# Altium PCB PCB_all_try_6.PcbDoc (part 4 of 5)
Units mm, origin at the board's own origin, x right, y up, seen from the top; angles counter-clockwise.
Board outline 425 x 295 mm, 2 copper layers (Top Layer, Bottom Layer); 485 components, 419 nets, 1569 pads, 847 vias.
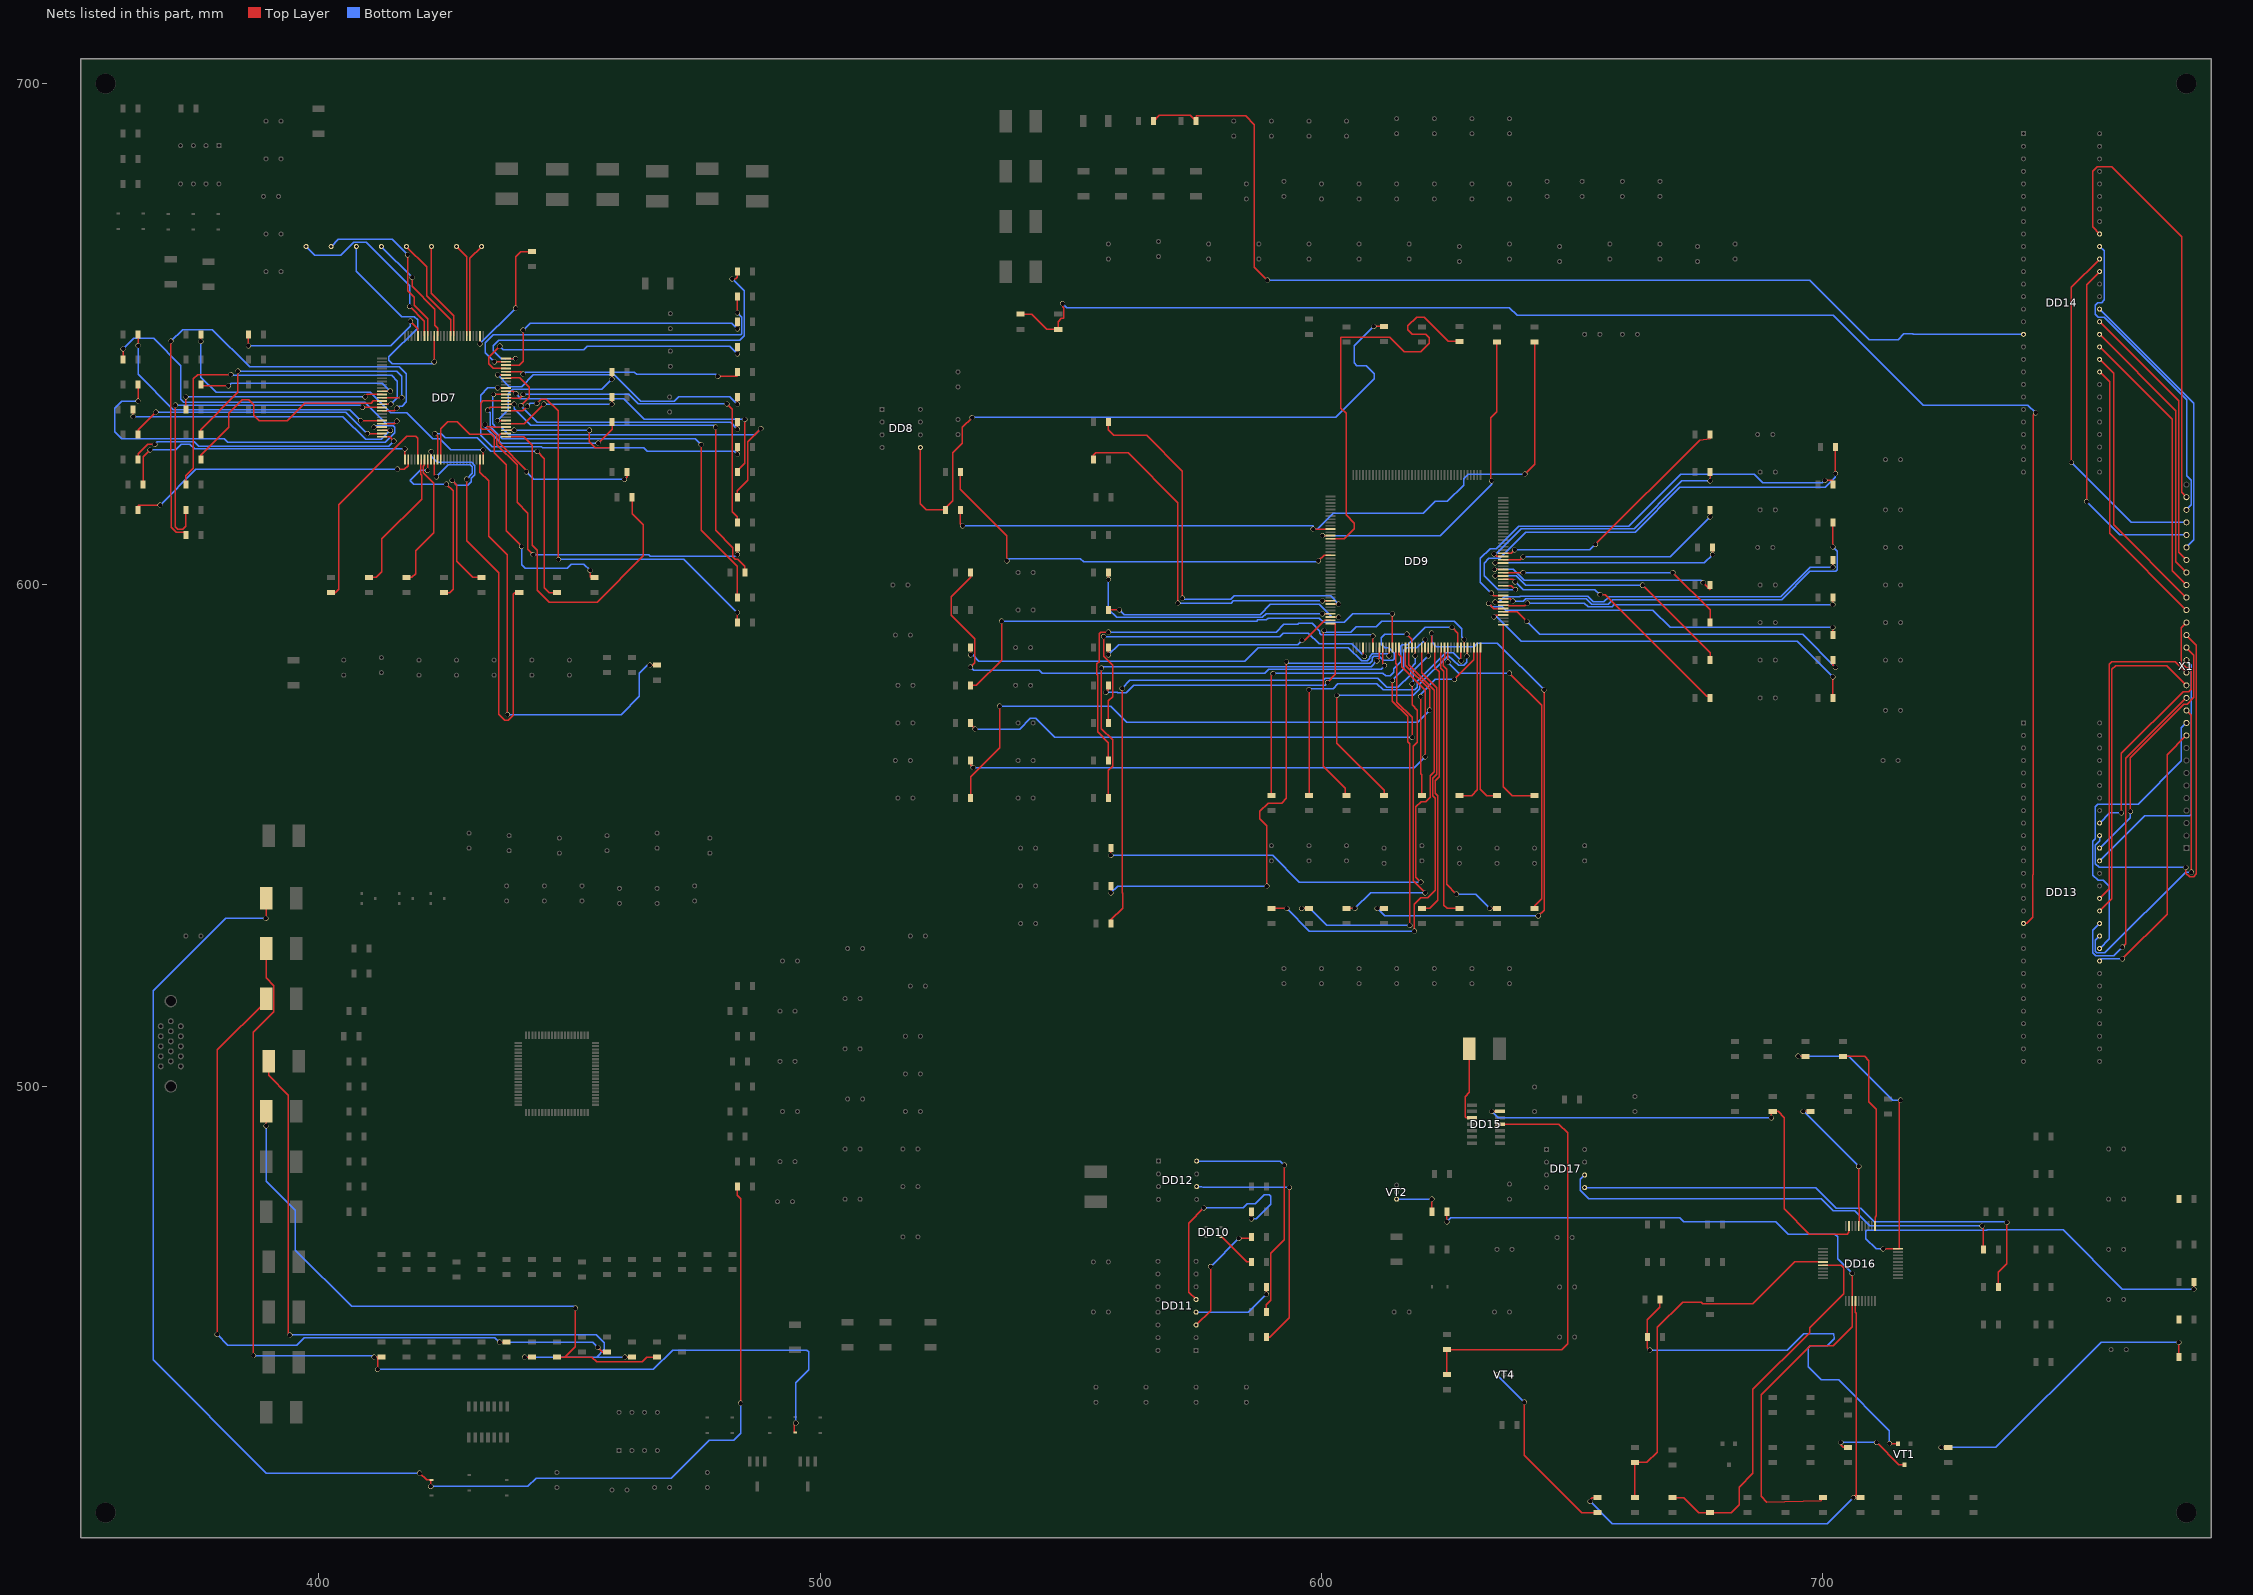
[diagram p4: the nets of this part, all layers, seen from the top]

## Via types
v1: diameter 1, hole 0.9, Top Layer to Bottom Layer, 847 vias

## Nets (pads, with @x,y where several pads share a name; then routed paths per layer and width w, separated by ;. In a path a pad name is that pad's centre, name@x,y a point inside that pad or via, vN(x,y) a via of type N, cw(c..) or ccw(c..) an arc to the next point about the centre after c; other vN are vias at no path point) (continued)
NetDD7_11: DD7.11 R72.1 | length 40.6
  Top Layer w0.25: R72.1@376.5,640 376.5,639.699 v1(381.991,639.699) ; DD7.11@412.65,638.65 414.274,638.65 v1(414.274,638.658)
  Bottom Layer w0.25: v1(381.991,639.699) 382.575,640.283 412.648,640.283 v1(414.274,638.658)
NetDD7_12: DD7.12 R71.1 | length 41.9
  Top Layer w0.25: R71.1@373.5,635 v1(373.5,637.515) ; v1(409.242,637.515) 409.727,638 DD7.12@412.65,638
  Bottom Layer w0.25: v1(373.5,637.515) v1(409.242,637.515)
NetDD7_13: DD7.13 R70.1 | length 57.1
  Top Layer w0.25: R70.1@376.5,630 376.5,631.008 383.896,638.404 v1(383.896,642.671) ; DD7.13@412.65,637.35 v1(416.585,637.35)
  Bottom Layer w0.25: v1(383.896,642.671) 415.544,642.671 416.585,641.629 v1(416.585,637.35)
NetDD7_14: DD7.14 R69.1 | length 47.8
  Top Layer w0.25: R69.1@376.5,625 376.5,625.856 382.067,631.423 382.067,634.213 384.785,636.93 386.08,636.93 387.096,635.914 387.096,633.806 388.112,632.79 393.725,632.79 397.231,636.295 410.489,636.295 410.894,636.7 DD7.14@412.65,636.7
NetDD7_15: DD7.15 R68.1 | length 70.1
  Top Layer w0.25: R68.1@373.5,620 373.5,621.785 375.006,623.291 375.006,641.096 375.844,641.934 v1(382.473,641.934) ; DD7.15@412.65,636.05 v1(414.376,636.05)
  Bottom Layer w0.25: v1(382.473,641.934) 382.626,641.782 414.528,641.782 415.671,640.639 415.671,637.345 v1(414.376,636.05)
NetDD7_16: DD7.16 R67.1 | length 71.5
  Top Layer w0.25: v1(371.399,635.864) 371.399,611.591 371.856,611.134 372.872,611.134 373.5,611.762 R67.1@373.5,615 ; v1(408.711,635.406) 408.718,635.4 DD7.16@412.65,635.4
  Bottom Layer w0.25: v1(371.399,635.864) 408.254,635.864 v1(408.711,635.406)
NetDD7_17: DD7.17 R66.1 | length 103.7
  Top Layer w0.25: v1(370.51,648.614) 370.51,617.857 370.625,617.742 370.625,611.517 371.602,610.54 373.5,610.54 R66.1@373.5,610 ; DD7.17@412.65,634.75 415.091,634.75 v1(415.595,635.254)
  Bottom Layer w0.25: v1(370.51,648.614) 372.847,650.951 378.816,650.951 386.283,643.484 416.103,643.484 417.474,642.112 417.474,636.524 416.636,635.686 416.027,635.686 v1(415.595,635.254)
NetDD7_20: DD7.20 R89.1 | length 60.5
  Top Layer w0.25: v1(364,647.751) R89.1@364,650 ; v1(408.371,632.8) DD7.20@412.65,632.8
  Bottom Layer w0.25: v1(364,647.751) 364,642.018 371.033,634.985 406.187,634.985 v1(408.371,632.8)
NetDD7_21: DD7.21 R88.1 | length 71.8
  Top Layer w0.25: R88.1@361,645 v1(361,647.08) ; DD7.21@412.65,632.15 415.082,632.15 v1(415.595,632.663)
  Bottom Layer w0.25: v1(361,647.08) 363.093,649.173 367.106,649.173 372.516,643.763 372.516,637.032 373.101,636.448 409.169,636.448 413.383,632.233 415.165,632.233 v1(415.595,632.663)
NetDD7_22: DD7.22 R87.1 | length 77.9
  Top Layer w0.25: v1(364,636.651) R87.1@364,640 ; v1(411.028,631.495) 411.033,631.5 DD7.22@412.65,631.5
  Bottom Layer w0.25: v1(364,636.651) 360.731,636.651 359.334,635.254 359.334,630.555 360.68,629.209 381.127,629.209 381.914,628.421 413.258,628.421 415.163,630.326 415.163,631.444 414.878,631.729 411.262,631.729 v1(411.028,631.495)
NetDD7_23: DD7.23 R86.1 | length 57
  Top Layer w0.25: v1(362.991,633.578) 363,633.586 R86.1@363,635 ; DD7.23@412.65,630.85 v1(414.274,630.85)
  Bottom Layer w0.25: v1(362.991,633.578) 404.825,633.578 409.372,629.031 412.455,629.031 v1(414.274,630.85)
NetDD7_24: DD7.24 R85.1 | length 52.8
  Top Layer w0.25: R85.1@364,630 364,630.936 v1(367.545,634.481) ; v1(409.727,630.2) DD7.24@412.65,630.2
  Bottom Layer w0.25: v1(367.545,634.481) 405.447,634.481 v1(409.727,630.2)
NetDD7_25: DD7.25 R84.1 | length 56.6
  Top Layer w0.25: R84.1@364,625 364,626.135 365.93,628.066 v1(367.327,628.066) ; DD7.25@412.65,629.55 414.161,629.55 v1(415.011,628.701)
  Bottom Layer w0.25: v1(367.327,628.066) 367.835,628.573 375.21,628.573 376.089,627.694 414.004,627.694 v1(415.011,628.701)
NetDD7_26: DD7.26 R83.1 | length 61.3
  Top Layer w0.25: R83.1@365,620 365,625.579 v1(366.37,626.948) ; DD7.26@417.2,625 v1(417.2,627.126)
  Bottom Layer w0.25: v1(366.37,626.948) 371.497,626.948 372.618,628.069 374.317,628.069 375.26,627.126 v1(417.2,627.126)
NetDD7_27: DD7.27 R82.1 | length 59.2
  Top Layer w0.25: R82.1@364,615 364,615.95 v1(368.376,615.95) ; v1(415.696,623.087) 417.113,623.087 417.85,623.824 DD7.27@417.85,625
  Bottom Layer w0.25: v1(368.376,615.95) 375.514,623.087 v1(415.696,623.087)
NetDD7_30: DD7.30 R107.1 | length 44.6
  Top Layer w0.25: R107.1@402.5,598.5 403.352,598.5 403.962,599.11 403.962,616.052 417.576,629.666 419.379,629.666 419.8,629.245 DD7.30@419.8,625
NetDD7_31: DD7.31 R106.1 | length 28.8
  Top Layer w0.25: R106.1@410,601.5 411.48,601.5 412.598,602.618 412.598,609.19 420.537,617.129 420.537,621.884 420.367,622.054 420.367,624.179 420.45,624.262 DD7.31@420.45,625
NetDD7_32: DD7.32 R105.1 | length 27.4
  Top Layer w0.25: R105.1@417.5,601.5 418.592,601.5 419.329,602.237 419.329,606.781 422.961,610.413 422.961,620.268 420.871,622.358 420.871,623.672 421.1,623.901 DD7.32@421.1,625
NetDD7_33: DD7.33 R104.1 | length 37.6
  Top Layer w0.25: v1(421.75,622.859) DD7.33@421.75,625 ; R104.1@425,598.5 426.136,598.5 426.822,599.186 426.822,618.754 v1(425.45,620.126)
  Bottom Layer w0.25: v1(421.75,622.859) 420.268,622.859 418.262,620.852 418.262,620.776 418.912,620.126 v1(425.45,620.126)
NetDD7_34: DD7.34 R103.1 | length 42.9
  Top Layer w0.25: DD7.34@422.4,625 422.4,626.581 v1(422.427,626.608) ; v1(426.593,620.852) 427.533,619.912 427.533,604.7 430.733,601.5 R103.1@432.5,601.5
  Bottom Layer w0.25: v1(422.427,626.608) 422.427,625.69 423.672,624.445 430.505,624.445 431.126,623.824 431.126,622.027 430.408,621.309 430.408,620.563 429.768,619.922 427.523,619.922 v1(426.593,620.852)
NetDD7_35: DD7.35 R102.1 | length 93.7
  Top Layer w0.25: DD7.35@423.05,625 423.05,621.967 v1(423.453,621.563) ; v1(429.489,621.132) 429.489,608.866 435.889,602.465 435.889,574.269 437.134,573.024 437.794,573.024 438.81,574.04 438.81,598.17 439.14,598.5 R102.1@440,598.5
  Bottom Layer w0.25: v1(423.453,621.563) 425.831,623.941 430.276,623.941 430.622,623.595 430.622,622.265 v1(429.489,621.132)
NetDD7_36: DD7.36 R101.1 | length 57.9
  Top Layer w0.25: v1(423.189,630.174) 423.7,629.663 DD7.36@423.7,625 ; v1(443.586,626.669) 445.033,625.221 445.033,599.44 445.973,598.5 R101.1@447.5,598.5
  Bottom Layer w0.25: v1(423.189,630.174) 424.42,630.174 425.258,629.336 431.648,629.336 434.315,626.669 v1(443.586,626.669)
NetDD7_37: DD7.37 R100.1 | length 63.4
  Top Layer w0.25: DD7.37@424.35,625 424.35,631.157 425.704,632.511 427.66,632.511 430.149,630.022 434.442,630.022 435,629.463 435,626.415 437.439,623.976 437.439,610.768 v1(440.487,607.72) ; v1(454.152,602.894) 454.152,601.5 R100.1@455,601.5
  Bottom Layer w0.25: v1(440.487,607.72) 440.487,604.063 441.208,603.342 449.565,603.342 450.368,604.144 452.902,604.144 v1(454.152,602.894)
NetDD7_49: DD7.49 R97.1 | length 89.7
  Top Layer w0.25: DD7.49@432.15,625 432.15,622.526 433.895,620.781 433.895,609.75 437.657,605.988 437.657,574.182 v1(437.642,574.167) ; v1(466.065,584) R97.1@467.5,584
  Bottom Layer w0.25: v1(437.642,574.167) 460.299,574.167 463.956,577.825 463.956,582.397 465.56,584 v1(466.065,584)
NetDD7_50: DD7.50 R96.1 | length 72.8
  Top Layer w0.25: v1(376.5,648.564) R96.1@376.5,650 ; DD7.50@432.8,625 v1(432.8,626.923)
  Bottom Layer w0.25: v1(376.5,648.564) 376.5,641.456 379.552,638.404 410.261,638.404 414.325,634.34 417.576,634.34 422.77,629.145 424.167,629.145 426.39,626.923 v1(432.8,626.923)
NetDD7_51: DD7.51 R95.1 | length 73.8
  Top Layer w0.25: DD7.51@437.35,629.55 440.932,629.55 442.61,627.872 442.61,607.964 443.626,606.948 443.626,598.917 445.938,596.605 455.533,596.605 464.718,605.79 464.718,612.004 462.5,614.223 R95.1@462.5,617.5
NetDD7_52: DD7.52 R94.1 | length 32.8
  Top Layer w0.25: DD7.52@437.35,630.2 436.296,630.2 436.016,629.92 436.016,628.328 441.427,622.918 v1(441.427,622.579) ; v1(460.985,621.081) 461.5,621.596 R94.1@461.5,622.5
  Bottom Layer w0.25: v1(441.427,622.579) 442.925,621.081 v1(460.985,621.081)
NetDD7_53: DD7.53 R93.1 | length 24.1
  Top Layer w0.25: DD7.53@437.35,630.85 438.978,630.85 v1(438.988,630.86) ; v1(454,630.86) 454,628.548 455.168,627.38 458.5,627.38 R93.1@458.5,627.5
  Bottom Layer w0.25: v1(438.988,630.86) v1(454,630.86)
NetDD7_54: DD7.54 R92.1 | length 34.1
  Top Layer w0.25: v1(433.172,632.008) 433.583,631.597 434.734,631.597 434.832,631.5 DD7.54@437.35,631.5 ; v1(455.727,628.294) 458.5,631.068 R92.1@458.5,632.5
  Bottom Layer w0.25: v1(433.172,632.008) 433.172,631.5 436.377,628.294 v1(455.727,628.294)
NetDD7_55: DD7.55 R91.1 | length 24.2
  Top Layer w0.25: DD7.55@437.35,632.15 440.997,632.15 v1(444.913,636.067) ; v1(458.495,636.067) 458.5,636.071 R91.1@458.5,637.5
  Bottom Layer w0.25: v1(444.913,636.067) v1(458.495,636.067)
NetDD7_56: DD7.56 R90.1 | length 31.3
  Top Layer w0.25: v1(435.635,632.79) 435.645,632.8 DD7.56@437.35,632.8 ; v1(458.495,641.071) 458.5,641.075 R90.1@458.5,642.5
  Bottom Layer w0.25: v1(435.635,632.79) 437.769,634.924 437.769,638.124 438.697,639.052 456.477,639.052 v1(458.495,641.071)
NetDD7_59: DD7.59 R81.1 | length 84.1
  Top Layer w0.25: DD7.59@437.35,634.75 440.719,634.75 v1(441.63,635.66) ; v1(443.535,636.219) 444.348,637.032 445.414,637.032 447.735,634.712 447.735,605.146 v1(447.802,605.079) ; v1(483.489,594.512) 483.5,594.501 R81.1@483.5,592.5
  Bottom Layer w0.25: v1(441.63,635.66) 442.189,636.219 v1(443.535,636.219) ; v1(447.802,605.079) 447.875,605.152 472.849,605.152 v1(483.489,594.512)
NetDD7_60: DD7.60 R80.1 | length 84.5
  Top Layer w0.25: v1(433.68,634.892) 434.188,635.4 DD7.60@437.35,635.4 ; v1(476.275,628.015) 476.275,610.919 483.5,603.694 R80.1@483.5,597.5
  Bottom Layer w0.25: v1(433.68,634.892) 434.202,634.37 434.202,631.596 436.589,629.209 475.082,629.209 v1(476.275,628.015)
NetDD7_61: DD7.61 R79.1 | length 75.9
  Top Layer w0.25: DD7.61@437.35,636.05 v1(438.988,636.05) ; v1(479.146,631.495) 479.146,610.895 482.6,607.441 482.6,605.663 483.108,605.155 483.616,605.155 485,603.771 R79.1@485,602.5
  Bottom Layer w0.25: v1(438.988,636.05) 438.988,635.177 442.341,631.825 478.815,631.825 v1(479.146,631.495)
NetDD7_62: DD7.62 R78.1 | length 83.2
  Top Layer w0.25: DD7.62@437.35,636.7 432.748,636.7 432.293,636.245 432.293,631.409 432.664,631.038 434.34,631.038 435.512,629.865 435.512,628.015 439.572,623.955 439.572,616.509 441.731,614.35 441.731,607.085 v1(442.747,606.069) ; v1(483.489,606.069) 483.5,606.08 R78.1@483.5,607.5
  Bottom Layer w0.25: v1(442.747,606.069) 465.781,606.069 466.135,605.715 483.134,605.715 v1(483.489,606.069)
NetDD7_63: DD7.63 R77.1 | length 69.7
  Top Layer w0.25: DD7.63@437.35,637.35 438.465,637.35 438.544,637.271 440.059,637.271 v1(440.792,638.003) ; v1(481.432,636.117) 482.524,635.025 482.524,614.589 483.5,613.613 R77.1@483.5,612.5
  Bottom Layer w0.25: v1(440.792,638.003) 461.856,638.003 463.742,636.117 v1(481.432,636.117)
NetDD7_64: DD7.64 R76.1 | length 78.9
  Top Layer w0.25: v1(434.833,638) DD7.64@437.35,638 ; R76.1@483.5,617.5 483.5,618.795 485.546,620.841 485.546,628.523 v1(488.188,631.165)
  Bottom Layer w0.25: v1(434.833,638) 434.706,637.873 434.706,632.12 435.356,631.469 436.397,631.469 437.921,629.945 486.969,629.945 v1(488.188,631.165)
NetDD7_65: DD7.65 R75.1 | length 61.2
  Top Layer w0.25: DD7.65@437.35,638.65 438.843,638.65 v1(439.344,638.15) ; R75.1@483.5,622.5 483.5,622.808 485.013,624.321 v1(485.013,633.019)
  Bottom Layer w0.25: v1(439.344,638.15) 439.42,638.15 439.744,637.825 440.186,637.098 460.842,637.098 464.922,633.019 v1(485.013,633.019)
NetDD7_66: DD7.66 R74.1 | length 67.8
  Top Layer w0.25: v1(435.704,639.293) 435.712,639.3 DD7.66@437.35,639.3 ; v1(483.489,626.085) 483.5,626.096 R74.1@483.5,627.5
  Bottom Layer w0.25: v1(435.704,639.293) 433.756,639.293 432.293,637.829 432.293,629.885 434.629,627.548 444.457,627.548 444.625,627.38 464.82,627.38 465.557,626.643 482.93,626.643 v1(483.489,626.085)
NetDD7_69: DD7.69 R65.1 | length 56.5
  Top Layer w0.25: DD7.69@437.35,641.25 438.382,641.25 438.469,641.337 440.119,641.337 441.992,639.464 441.992,637.471 v1(440.309,635.787) ; v1(483.489,631.063) 483.5,631.074 R65.1@483.5,632.5
  Bottom Layer w0.25: v1(440.309,635.787) 440.309,635.706 443.606,632.409 482.143,632.409 v1(483.489,631.063)
NetDD7_70: DD7.70 R64.1 | length 56
  Top Layer w0.25: v1(435.712,641.909) 435.72,641.9 DD7.70@437.35,641.9 ; v1(483.5,636.067) R64.1@483.5,637.5
  Bottom Layer w0.25: v1(435.712,641.909) 438.048,639.572 440.461,639.572 442.839,641.95 458.937,641.95 464.266,636.621 470.865,636.621 471.784,637.54 482.027,637.54 v1(483.5,636.067)
NetDD7_71: DD7.71 R63.1 | length 47.8
  Top Layer w0.25: DD7.71@437.35,642.55 440.277,642.55 v1(440.792,642.036) ; v1(479.628,641.604) 483.5,641.604 R63.1@483.5,642.5
  Bottom Layer w0.25: v1(440.792,642.036) 441.209,642.454 462.985,642.454 463.403,642.036 479.196,642.036 v1(479.628,641.604)
NetDD7_72: DD7.72 R61.1 | length 58.2
  Top Layer w0.25: v1(436.118,647.624) 433.934,645.439 433.934,644.114 434.848,643.2 DD7.72@437.35,643.2 ; v1(483.489,646.074) 483.5,646.085 R61.1@483.5,647.5
  Bottom Layer w0.25: v1(436.118,647.624) 436.782,646.959 452.885,646.959 453.549,647.624 481.94,647.624 v1(483.489,646.074)
NetDD7_73: DD7.73 R60.1 | length 55.1
  Top Layer w0.25: DD7.73@437.35,643.85 439.99,643.85 440.792,644.652 v1(440.792,650.824) ; v1(483.489,651.089) 483.5,651.1 R60.1@483.5,652.5
  Bottom Layer w0.25: v1(440.792,650.824) 442.163,652.196 482.382,652.196 v1(483.489,651.089)
NetDD7_74: DD7.74 R58.1 | length 66.5
  Top Layer w0.25: v1(435.051,644.5) DD7.74@437.35,644.5 ; v1(483.5,654.268) R58.1@483.5,657.5
  Bottom Layer w0.25: v1(435.051,644.5) 433.222,646.329 433.222,648.284 434.848,649.91 484.2,649.91 484.378,650.088 484.378,653.39 v1(483.5,654.268)
NetDD7_75: DD7.75 R55.1 | length 73.5
  Top Layer w0.25: DD7.75@437.35,645.15 v1(439.268,645.15) ; v1(482.473,661.06) 483.144,661.06 483.5,661.416 R55.1@483.5,662.5
  Bottom Layer w0.25: v1(439.268,645.15) 436.458,645.15 434.848,646.76 434.848,647.751 435.864,648.767 483.946,648.767 484.886,649.707 484.886,658.647 v1(482.473,661.06)
NetDD7_77: DD7.77 R54.1 | length 25.6
  Top Layer w0.25: v1(432.13,648.081) 432.15,648.101 DD7.77@432.15,649.7 ; v1(439.268,655.218) 439.268,665.48 440.288,666.5 R54.1@442.5,666.5
  Bottom Layer w0.25: v1(432.13,648.081) v1(439.268,655.218)
NetDD7_80: DD7.80 RX_D2+.1 | length 18.9
  Top Layer w0.25: DD7.80@430.2,649.7 430.2,650.179 430.117,650.179 430.117,665.117 RX_D2+.1@432.5,667.5
NetDD7_81: DD7.81 RX_D2-.1 | length 18.6
  Top Layer w0.25: RX_D2-.1@427.5,667.5 429.55,665.45 DD7.81@429.55,649.7
NetDD7_85: DD7.85 RX_D1+.1 | length 19.6
  Top Layer w0.25: RX_D1+.1@422.5,667.5 422.5,658.143 426.95,653.693 DD7.85@426.95,649.7
NetDD7_86: DD7.86 RX_D1-.1 | length 21.4
  Top Layer w0.25: RX_D1-.1@417.5,667.5 421.538,663.462 421.538,657.682 426.3,652.921 DD7.86@426.3,649.7
NetDD7_90: DD7.90 RX_D0+.1 | length 22.4
  Top Layer w0.25: v1(418.643,661.357) 418.643,659.537 423.189,654.99 423.189,651.764 423.7,651.253 DD7.90@423.7,649.7
  Bottom Layer w0.25: RX_D0+.1@412.5,667.5 v1(418.643,661.357)
NetDD7_91: DD7.91 RX_D0-.1 | length 46.3
  Top Layer w0.25: v1(423.05,644.474) DD7.91@423.05,649.7
  Bottom Layer w0.25: RX_D0-.1@407.5,667.5 407.5,662.567 416.56,653.507 419.1,653.507 419.713,652.894 419.713,651.234 414.02,645.541 414.02,644.779 414.655,644.144 422.72,644.144 v1(423.05,644.474)
NetDD7_93: DD7.93 RX_CLK+.1 | length 34.9
  Top Layer w0.25: v1(417.754,665.861) 417.754,658.678 419.039,657.393 419.039,655.762 421.75,653.051 DD7.93@421.75,649.7
  Bottom Layer w0.25: RX_CLK+.1@402.5,667.5 403.909,668.909 414.706,668.909 v1(417.754,665.861)
NetDD7_94: DD7.94 RX_CLK-.1 | length 37.3
  Top Layer w0.25: v1(418.16,655.574) 421.1,652.634 DD7.94@421.1,649.7
  Bottom Layer w0.25: RX_CLK-.1@397.5,667.5 399.266,665.734 404.368,665.734 407.035,668.401 409.448,668.401 418.16,659.689 v1(418.16,655.574)
NetDD7_96: DD7.96 R59.2 | length 40.8
  Top Layer w0.25: v1(386,647.7) R59.2@386,650 ; v1(418.276,652.628) 419.8,651.104 DD7.96@419.8,649.7
  Bottom Layer w0.25: v1(386,647.7) 386.025,647.675 414.339,647.675 418.276,651.612 v1(418.276,652.628)
NetDD8_5: DD8.5 R111.2 R117.2 | length 137.7
  Top Layer w0.25: DD8.5@520,627.42 520,616.193 521.208,614.985 525,614.985 R117.2@525,615 525,615.29 526.491,616.781 526.491,626.364 528.396,628.269 528.396,631.495 v1(530.301,633.4) ; v1(610.432,651.58) R111.2@612.5,651.58
  Bottom Layer w0.25: v1(530.301,633.4) 530.305,633.404 602.848,633.404 610.54,641.096 610.54,642.112 608.889,643.763 607.06,643.763 606.527,644.296 606.527,647.675 v1(610.432,651.58)
NetDD9_11: DD9.11 R113.1 R117.1 | length 152.1
  Top Layer w0.25: R117.1@528,615 528,612.231 v1(528.447,611.784) ; v1(598.348,611.15) DD9.11@601.8,611.15 ; v1(640.549,622.134) 642.5,624.085 R113.1@642.5,648.5
  Bottom Layer w0.25: v1(528.447,611.784) 598.348,611.784 v1(598.348,611.15) 599.166,611.15 602.348,614.332 620.258,614.332 622.645,616.719 625.126,616.719 628.345,619.938 628.345,621.208 629.271,622.134 v1(640.549,622.134)
NetDD9_13: DD9.13 R114.1 | length 68.6
  Top Layer w0.25: v1(600.177,609.854) 600.177,609.85 DD9.13@601.8,609.85 ; v1(633.908,620.751) 633.795,620.864 633.795,633.31 635,634.515 R114.1@635,648.5
  Bottom Layer w0.25: v1(600.177,609.854) 623.676,609.854 633.908,620.086 v1(633.908,620.751)
NetDD9_14: DD9.14 R115.1 | length 84.3
  Top Layer w0.25: DD9.14@601.8,609.2 604.572,609.2 606.552,611.18 606.552,612.318 604.901,613.969 604.901,634.213 603.86,635.254 603.86,649.427 613.613,649.427 616.509,646.532 619.836,646.532 621.513,648.208 621.513,649.275 620.776,650.011 618.067,650.011 617.22,650.858 617.22,651.654 618.956,653.39 620.471,653.39 625.281,648.58 R115.1@627.5,648.58
NetDD9_19: DD9.19 R118.1 | length 87.1
  Top Layer w0.25: R118.1@528,622.5 528,619.115 537.261,609.854 v1(537.261,604.799) ; v1(599.364,604.799) 600.514,605.95 DD9.19@601.8,605.95
  Bottom Layer w0.25: v1(537.261,604.799) 537.687,605.226 551.934,605.226 552.566,604.593 599.157,604.593 v1(599.364,604.799)
NetDD9_33: DD9.33 R130.2 | length 72.7
  Top Layer w0.25: R130.2@554.5,625 554.5,625.867 554.99,626.357 561.449,626.357 571.373,616.433 v1(571.373,596.396) ; v1(600.177,596.849) DD9.33@601.8,596.85
  Bottom Layer w0.25: v1(571.373,596.396) 581.986,596.396 582.44,596.849 v1(600.177,596.849)
NetDD9_34: DD9.34 R129.2 | length 78.9
  Top Layer w0.25: R129.2@557.5,632.5 557.5,630.936 558.618,629.818 565.15,629.818 572.262,622.706 v1(572.262,597.383) ; DD9.34@601.8,596.2 v1(603.428,596.2)
  Bottom Layer w0.25: v1(572.262,597.383) 572.531,597.113 581.853,597.113 582.554,597.814 601.814,597.814 v1(603.428,596.2)
NetDD9_37: DD9.37 R168.2 | length 52.6
  Top Layer w0.25: v1(557.5,601.07) R168.2@557.5,602.5 ; v1(600.177,594.258) 600.185,594.25 DD9.37@601.8,594.25
  Bottom Layer w0.25: v1(557.5,601.07) 557.5,595.203 559.167,593.536 588.228,593.536 588.951,594.258 v1(600.177,594.258)
NetDD9_38: DD9.38 R167.2 | length 49.9
  Top Layer w0.25: R167.2@557.5,595 557.5,595.02 v1(559.689,595.02) ; DD9.38@601.8,593.6 v1(603.428,593.6)
  Bottom Layer w0.25: v1(559.689,595.02) 560.67,594.04 587.741,594.04 589.83,596.129 599.572,596.129 602.101,593.6 v1(603.428,593.6)
NetDD9_39: DD9.39 R166.2 | length 48.6
  Top Layer w0.25: v1(557.5,586.08) R166.2@557.5,587.5 ; v1(596.113,588.95) 596.621,588.95 600.621,592.95 DD9.39@601.8,592.95
  Bottom Layer w0.25: v1(557.5,586.08) 559.533,588.112 595.275,588.112 v1(596.113,588.95)
NetDD9_40: DD9.40 R165.2 | length 60.1
  Top Layer w0.25: v1(556.997,578.561) 557.5,579.065 R165.2@557.5,580 ; v1(601.218,580.517) 601.218,580.644 602.742,582.168 602.742,592.3 DD9.40@601.8,592.3
  Bottom Layer w0.25: v1(556.997,578.561) 559.303,578.561 559.343,578.52 561.061,578.52 562.549,580.009 600.71,580.009 v1(601.218,580.517)
NetDD9_44: DD9.44 R164.2 | length 74.3
  Top Layer w0.25: v1(556.539,589.712) 556.539,585.749 558.335,583.954 558.335,577.72 557.5,576.885 R164.2@557.5,572.5 ; DD9.44@608.3,587.5 608.3,585.983 v1(608.533,585.749)
  Bottom Layer w0.25: v1(556.539,589.712) 591.693,589.712 592.328,590.347 597.408,590.347 599.507,588.248 606.035,588.248 v1(608.533,585.749)
NetDD9_47: DD9.47 R163.2 | length 85.5
  Top Layer w0.25: R163.2@557.5,565 557.5,568.554 555.346,570.708 555.346,582.026 555.203,582.168 555.203,584.292 555.65,584.739 555.65,590.296 555.955,590.601 v1(557.505,590.601) ; DD9.47@610.25,587.5 v1(610.25,589.798)
  Bottom Layer w0.25: v1(557.505,590.601) 590.931,590.601 592.457,592.127 595.307,592.127 595.507,592.328 598.145,592.328 599.658,590.815 599.658,590.357 599.948,590.067 609.981,590.067 v1(610.25,589.798)
NetDD9_49: DD9.49 R162.2 | length 85.6
  Top Layer w0.25: v1(556.082,583.413) 556.082,571.348 558.343,569.087 558.343,563.88 557.5,563.037 R162.2@557.5,557.5 ; v1(611.042,584.874) 611.55,585.382 DD9.49@611.55,587.5
  Bottom Layer w0.25: v1(556.082,583.413) 556.412,583.743 609.91,583.743 v1(611.042,584.874)
NetDD9_50: DD9.50 R161.2 | length 110.2
  Top Layer w0.25: v1(529.996,583.641) 530.885,584.53 530.885,589.28 526.161,594.004 526.161,597.684 530,601.523 R161.2@530,602.5 ; DD9.50@612.2,587.5 612.2,584.24 v1(612.546,583.894)
  Bottom Layer w0.25: v1(529.996,583.641) 530.606,583.032 543.687,583.032 544.301,582.418 588.667,582.418 589.487,583.239 611.89,583.239 v1(612.546,583.894)
NetDD9_52: DD9.52 R160.2 | length 90.3
  Top Layer w0.25: v1(530,586.051) R160.2@530,587.5 ; v1(613.5,585.876) DD9.52@613.5,587.5
  Bottom Layer w0.25: v1(530,586.051) 530.415,586.051 531.67,584.796 584.669,584.796 587.375,587.502 605.364,587.502 607.996,584.87 609.092,584.87 609.583,585.361 609.583,585.732 610.108,586.257 613.119,586.257 v1(613.5,585.876)
NetDD9_53: DD9.53 R159.2 | length 102.1
  Top Layer w0.25: R159.2@530,580 530,579.984 531.19,579.984 536.194,584.987 v1(536.194,592.785) ; DD9.53@614.15,587.5 v1(614.15,594.258)
  Bottom Layer w0.25: v1(536.194,592.785) 587.052,592.785 587.299,593.032 588.973,593.032 589.336,593.395 599.567,593.395 600.435,592.527 604.515,592.527 606.247,594.258 v1(614.15,594.258)
NetDD9_54: DD9.54 R158.2 | length 110.4
  Top Layer w0.25: R158.2@530,572.5 530,572.211 v1(530.94,571.271) ; DD9.54@614.8,587.5 614.8,584.354 615.034,584.12 615.034,576.658 618.058,573.634 v1(618.058,569.62)
  Bottom Layer w0.25: v1(530.94,571.271) 539.852,571.271 541.959,573.379 543.052,573.379 546.811,569.62 v1(618.058,569.62)
NetDD9_55: DD9.55 R157.2 | length 116.6
  Top Layer w0.25: R157.2@530,565 530,564.08 v1(530.504,563.575) ; DD9.55@615.45,587.5 615.45,586.156 616.017,585.589 616.017,583.701 620.674,579.044 v1(620.674,565.734)
  Bottom Layer w0.25: v1(530.504,563.575) 618.515,563.575 v1(620.674,565.734)
NetDD9_57: DD9.57 R156.2 | length 123.3
  Top Layer w0.25: R156.2@530,557.5 530,561.746 535.788,567.534 v1(535.788,575.843) ; DD9.57@616.75,587.5 616.75,583.971 621.563,579.158 v1(621.563,575.031)
  Bottom Layer w0.25: v1(535.788,575.843) 557.989,575.843 561.161,572.671 619.204,572.671 v1(621.563,575.031)
NetDD9_58: DD9.58 R155.2 | length 116.8
  Top Layer w0.25: R155.2@558,547.5 558,546.087 v1(558.013,546.075) ; DD9.58@617.4,587.5 617.4,584.078 622.452,579.025 622.452,562.733 621.657,561.938 621.657,557.667 620.776,556.786 619.854,556.786 618.82,555.752 618.82,541.757 v1(619.836,540.741)
  Bottom Layer w0.25: v1(558.013,546.075) 590.245,546.075 595.579,540.741 v1(619.836,540.741)
NetDD9_59: DD9.59 R154.2 | length 119.4
  Top Layer w0.25: R154.2@558,540 558,538.594 v1(558.013,538.582) ; v1(589.102,539.928) 589.102,551.977 587.69,553.39 587.69,554.853 589.351,556.514 592.074,556.514 592.988,557.428 v1(592.988,584.683) ; v1(617.034,590.194) 618.05,589.178 DD9.59@618.05,587.5
  Bottom Layer w0.25: v1(558.013,538.582) 559.359,539.928 v1(589.102,539.928) ; v1(592.988,584.683) 593.319,584.352 609.6,584.352 610.159,584.911 610.159,585.47 610.442,585.753 611.526,585.753 612.282,584.997 614.172,584.997 614.509,585.335 614.509,586.399 613.432,587.477 612.648,587.477 611.962,588.162 611.962,589.509 612.648,590.194 v1(617.034,590.194)
NetDD9_60: DD9.60 R153.2 | length 113.9
  Top Layer w0.25: R153.2@558,532.5 558,533.197 560.339,535.536 560.339,538.513 560.222,538.63 v1(560.222,579.399) ; v1(618.693,585.876) 618.7,585.883 DD9.60@618.7,587.5
  Bottom Layer w0.25: v1(560.222,579.399) 561.786,580.963 600.339,580.963 600.772,581.396 611.249,581.396 613.054,579.591 615.247,579.591 617.759,582.103 617.759,583.434 618.693,584.368 v1(618.693,585.876)
NetDD9_62: DD9.62 R152.2 | length 91.2
  Top Layer w0.25: R152.2@590,535.5 v1(593.082,535.5) ; v1(618.515,530.987) 618.515,536.321 619.795,537.601 621.157,537.601 622.704,539.148 622.704,557.461 622.162,558.004 622.162,561.434 622.956,562.229 622.956,579.526 620,582.483 DD9.62@620,587.5
  Bottom Layer w0.25: v1(593.082,535.5) 597.595,530.987 v1(618.515,530.987)
NetDD9_63: DD9.63 R151.2 | length 88.4
  Top Layer w0.25: v1(596.062,535.508) 596.07,535.5 R151.2@597.5,535.5 ; v1(614.147,580.974) 614.147,576.832 617.179,573.8 617.179,568.741 617.626,568.294 v1(617.626,532.13) ; v1(620.649,589.128) v1(620.649,589.128) DD9.63@620.65,587.5
  Bottom Layer w0.25: v1(596.062,535.508) 597.637,535.508 601.015,532.13 v1(617.626,532.13) ; v1(614.147,580.974) 616.438,583.266 616.438,586.949 616.991,587.502 619.023,587.502 v1(620.649,589.128)
NetDD9_64: DD9.64 R150.2 | length 68.9
  Top Layer w0.25: R150.2@605,535.5 v1(606.679,535.5) ; v1(618.058,580.288) 618.058,576.097 619.1,575.056 619.1,568.655 618.287,567.842 618.287,540.969 v1(620.649,538.607) ; DD9.64@621.3,587.5 621.3,585.886 v1(621.309,585.876)
  Bottom Layer w0.25: v1(606.679,535.5) 609.786,538.607 v1(620.649,538.607) ; v1(618.058,580.288) 618.287,580.517 618.287,582.854 v1(621.309,585.876)
NetDD9_65: DD9.65 R149.2 | length 111.3
  Top Layer w0.25: v1(611.114,535.508) 611.122,535.5 R149.2@612.5,535.5 ; v1(621.944,590.423) 621.95,590.417 DD9.65@621.95,587.5 ; v1(643.23,534.01) 644.387,535.167 v1(644.387,579.08)
  Bottom Layer w0.25: v1(611.114,535.508) 612.613,534.01 v1(643.23,534.01) ; v1(621.944,590.423) 621.944,588.67 622.935,587.68 630.428,587.68 631.114,588.366 635.102,588.366 v1(644.387,579.08)
NetDD9_66: DD9.66 R148.2 | length 55.2
  Top Layer w0.25: R148.2@620,535.5 621.604,535.5 623.208,537.105 623.208,557.965 622.666,558.508 622.666,560.93 623.46,561.725 623.46,582.654 622.6,583.515 DD9.66@622.6,587.5
NetDD9_68: DD9.68 R147.2 | length 54.9
  Top Layer w0.25: DD9.68@623.9,587.5 623.813,585.902 623.813,583.378 624.428,582.763 624.428,536.166 625.094,535.5 R147.2@627.5,535.5
NetDD9_69: DD9.69 R146.2 | length 59.6
  Top Layer w0.25: DD9.69@624.55,587.5 624.55,585.485 624.317,585.252 624.317,583.882 624.973,583.226 624.973,540.278 v1(626.923,538.328) ; v1(633.578,535.5) R146.2@635,535.5
  Bottom Layer w0.25: v1(626.923,538.328) 630.75,538.328 v1(633.578,535.5)
NetDD9_70: DD9.70 R145.2 | length 66.2
  Top Layer w0.25: v1(625.196,584.606) 625.2,584.611 DD9.70@625.2,587.5 ; v1(637.489,582.422) 643.883,576.028 643.883,537.457 642.5,536.074 R145.2@642.5,535.5
  Bottom Layer w0.25: v1(625.196,584.606) 627.38,582.422 v1(637.489,582.422)
NetDD9_73: DD9.73 R144.2 | length 71.1
  Top Layer w0.25: R144.2@590,558 590,581.974 v1(590.372,582.346) ; v1(626.028,591.545) 627.15,590.423 DD9.73@627.15,587.5
  Bottom Layer w0.25: v1(590.372,582.346) 590.434,582.408 612.213,582.408 612.768,581.854 613.664,581.854 614.399,582.588 614.399,583.251 615.848,584.701 615.848,587.778 616.139,588.068 617.202,588.068 620.678,591.545 v1(626.028,591.545)
NetDD9_74: DD9.74 R143.2 | length 59.5
  Top Layer w0.25: R143.2@597.5,558 597.51,558 v1(597.51,579.13) ; DD9.74@627.8,587.5 627.8,584.948 v1(627.863,584.886)
  Bottom Layer w0.25: v1(597.51,579.13) 597.724,579.345 602.312,579.345 603.281,580.314 611.066,580.314 612.292,579.087 618.625,579.087 619.127,579.589 619.127,580.823 624.75,586.447 626.302,586.447 v1(627.863,584.886)
NetDD9_75: DD9.75 R142.2 | length 68.4
  Top Layer w0.25: v1(600.532,590.956) 600.339,590.763 600.339,563.845 604.698,559.486 604.698,558 R142.2@605,558 ; DD9.75@628.45,587.5 v1(628.45,589.128)
  Bottom Layer w0.25: v1(600.532,590.956) 600.532,590.571 605.837,590.571 606.908,591.642 610.921,591.642 612.013,592.734 626.516,592.734 627.939,591.312 627.939,589.639 v1(628.45,589.128)
NetDD9_76: DD9.76 R141.2 | length 57.7
  Top Layer w0.25: v1(603.047,577.962) 603.047,568.477 612.5,559.024 R141.2@612.5,558 ; v1(629.016,585.792) 629.1,585.876 DD9.76@629.1,587.5
  Bottom Layer w0.25: v1(603.047,577.962) 618.309,577.962 619.643,579.296 619.643,580.328 625.242,585.927 627.329,583.997 628.396,583.997 629.016,584.616 v1(629.016,585.792)
NetDD9_78: DD9.78 R140.2 | length 36.2
  Top Layer w0.25: v1(619.785,577.748) 619.785,562.381 620,562.167 R140.2@620,558 ; v1(626.491,581.152) 630.4,585.061 DD9.78@630.4,587.5
  Bottom Layer w0.25: v1(619.785,577.748) 619.785,578.256 622.681,581.152 v1(626.491,581.152)
NetDD9_79: DD9.79 R139.2 | length 32.4
  Top Layer w0.25: R139.2@627.5,558 629.92,558 631.05,559.13 DD9.79@631.05,587.5
NetDD9_80: DD9.80 R138.2 | length 32.1
  Top Layer w0.25: DD9.80@631.7,587.5 631.7,559.268 632.968,558 R138.2@635,558
NetDD9_81: DD9.81 R137.2 | length 39.3
  Top Layer w0.25: DD9.81@636.25,592.05 636.245,592.05 636.245,559.803 638.048,558 R137.2@642.5,558
NetDD9_84: DD9.84 R136.2 | length 78.8
  Top Layer w0.25: v1(634.365,593.661) 634.704,594 DD9.84@636.25,594 ; R136.2@702,577.5 v1(702,581.656)
  Bottom Layer w0.25: v1(634.365,593.661) 634.962,593.661 639.877,588.747 694.909,588.747 v1(702,581.656)
NetDD9_85: DD9.85 R135.2 | length 72.5
  Top Layer w0.25: DD9.85@636.25,594.65 639.028,594.65 v1(640.944,592.734) ; R135.2@702,585 702,584.078 v1(702.513,583.565)
  Bottom Layer w0.25: v1(640.944,592.734) 643.535,590.144 695.935,590.144 v1(702.513,583.565)
NetDD9_86: DD9.86 R134.2 | length 75.5
  Top Layer w0.25: v1(633.324,596.316) 634.339,595.3 DD9.86@636.25,595.3 ; R134.2@702,590 v1(702,591.541)
  Bottom Layer w0.25: v1(633.324,596.316) 633.991,595.648 636.061,595.648 636.705,595.004 666.107,595.004 669.57,591.541 v1(702,591.541)
NetDD9_87: DD9.87 R133.2 | length 67.9
  Top Layer w0.25: DD9.87@636.25,595.95 637.286,595.95 637.377,595.859 640.537,595.859 v1(641.071,596.392) ; R133.2@702,597.5 702,596.067 v1(702.005,596.062)
  Bottom Layer w0.25: v1(641.071,596.392) 652.443,596.392 653.157,595.677 657.94,595.677 658.324,596.062 v1(702.005,596.062)
NetDD9_88: DD9.88 R132.2 | length 74.2
  Top Layer w0.25: v1(634.619,596.6) DD9.88@636.25,596.6 ; v1(702,603.58) R132.2@702,605
  Bottom Layer w0.25: v1(634.619,596.6) 635.371,596.6 636.447,597.676 639.588,597.676 639.688,597.775 653.076,597.775 654.166,596.685 656.336,596.685 657.348,597.697 691.55,597.697 697.433,603.58 v1(702,603.58)
NetDD9_89: DD9.89 R131.2 | length 80.2
  Top Layer w0.25: DD9.89@636.25,597.25 637.673,597.25 v1(638.16,596.763) ; v1(702,607.593) R131.2@702,612.5
  Bottom Layer w0.25: v1(638.16,596.763) 640.192,596.763 640.7,597.271 652.782,597.271 653.872,596.181 657.225,596.181 658.122,597.078 691.769,597.078 697.382,602.691 702.589,602.691 702.894,602.996 702.894,606.699 v1(702,607.593)
NetDD9_90: DD9.90 R128.2 | length 89.5
  Top Layer w0.25: v1(633.864,598.367) 634.33,597.9 DD9.90@636.25,597.9 ; v1(700.405,620.852) 702,620.852 R128.2@702,620
  Bottom Layer w0.25: v1(633.864,598.367) 631.657,600.573 631.657,605.291 633.629,607.263 634.873,607.263 639.343,611.734 661.318,611.734 671.631,622.046 686.333,622.046 688.035,620.344 699.897,620.344 v1(700.405,620.852)
NetDD9_93: DD9.93 R127.2 | length 95.8
  Top Layer w0.25: DD9.93@636.25,599.85 637.892,599.85 v1(638.683,599.059) ; v1(702.5,622.217) R127.2@702.5,627.5
  Bottom Layer w0.25: v1(638.683,599.059) 635.229,599.059 632.445,601.843 632.445,604.378 633.4,605.333 635.508,605.333 640.715,610.54 662.55,610.54 671.465,619.455 700.481,619.455 702.5,621.474 v1(702.5,622.217)
NetDD9_95: DD9.95 R126.2 | length 51.2
  Top Layer w0.25: DD9.95@636.25,601.15 638.124,601.15 v1(638.632,600.642) ; v1(655.549,598.068) 656.565,598.068 676.834,577.799 677.5,577.799 R126.2@677.5,577.5
  Bottom Layer w0.25: v1(638.632,600.642) 640.19,599.084 654.533,599.084 v1(655.549,598.068)
NetDD9_96: DD9.96 R125.2 | length 52.3
  Top Layer w0.25: v1(634.619,601.802) 634.621,601.8 DD9.96@636.25,601.8 ; v1(664.038,599.948) 677.5,586.486 R125.2@677.5,585
  Bottom Layer w0.25: v1(634.619,601.802) 638.859,601.802 640.713,599.948 v1(664.038,599.948)
NetDD9_97: DD9.97 R124.2 | length 46.9
  Top Layer w0.25: DD9.97@636.25,602.45 640.194,602.45 v1(640.207,602.463) ; v1(670.103,602.463) 677.5,595.065 R124.2@677.5,592.5
  Bottom Layer w0.25: v1(640.207,602.463) v1(670.103,602.463)
NetDD9_98: DD9.98 R123.2 | length 47.3
  Top Layer w0.25: v1(634.497,603.1) DD9.98@636.25,603.1 ; v1(676.107,600.471) 677.5,599.079 R123.2@677.5,600
  Bottom Layer w0.25: v1(634.497,603.1) 638.274,603.1 640.462,600.913 675.666,600.913 v1(676.107,600.471)
NetDD9_100: DD9.100 R122.2 | length 47.1
  Top Layer w0.25: v1(634.619,604.393) 634.626,604.4 DD9.100@636.25,604.4 ; v1(678,606.069) R122.2@678,607.5
  Bottom Layer w0.25: v1(634.619,604.393) 676.324,604.393 v1(678,606.069)
NetDD9_101: DD9.101 R121.2 | length 46.2
  Top Layer w0.25: DD9.101@636.25,605.05 639.635,605.05 v1(640.207,605.622) ; v1(677.494,613.562) 677.5,613.568 R121.2@677.5,615
  Bottom Layer w0.25: v1(640.207,605.622) 669.554,605.622 v1(677.494,613.562)
NetDD9_102: DD9.102 R120.2 | length 52.9
  Top Layer w0.25: v1(634.404,606.222) 634.926,605.7 DD9.102@636.25,605.7 ; v1(677.494,620.751) 677.5,620.756 R120.2@677.5,622.5
  Bottom Layer w0.25: v1(634.404,606.222) 634.822,606.222 639.83,611.23 662.336,611.23 671.857,620.751 v1(677.494,620.751)
NetDD9_103: DD9.103 R119.2 | length 51.4
  Top Layer w0.25: DD9.103@636.25,606.35 637.869,606.35 v1(638.528,607.009) ; v1(654.634,608.101) 675.437,628.904 677.5,629.158 R119.2@677.5,630
  Bottom Layer w0.25: v1(638.528,607.009) 653.542,607.009 v1(654.634,608.101)
NetDD10_4: DD10.4 R173.1 | length 8.1
  Top Layer w0.25: DD10.4@580,470 580.106,470 585.108,464.998 586,464.998 R173.1@586,465
NetDD11_3: DD11.3 R172.2 | length 23.6
  Top Layer w0.25: DD11.3@575,452.42 577.875,455.295 v1(577.875,464.033) ; v1(583.54,469.697) 586,469.697 R172.2@586,470
  Bottom Layer w0.25: v1(577.875,464.033) v1(583.54,469.697)
NetDD11_4: DD11.4 R174.1 | length 16.9
  Top Layer w0.25: v1(589.001,458.572) R174.1@589,460
  Bottom Layer w0.25: DD11.4@575,454.96 585.389,454.96 v1(589.001,458.572)
NetDD11_5: DD11.5 R171.2 | length 42.8
  Top Layer w0.25: DD11.5@575,457.5 573.532,458.968 573.532,472.745 v1(576.555,475.767) ; v1(586,473.583) R171.2@586,475
  Bottom Layer w0.25: v1(576.555,475.767) 584.398,475.767 585.236,476.606 586.796,476.606 588.626,478.436 589.534,478.436 589.89,478.08 589.89,476.504 586.969,473.583 v1(586,473.583)
NetDD12_6: DD12.6 R176.1 | length 50.7
  Top Layer w0.25: R176.1@589,450 589.725,450 593.598,453.873 v1(593.598,479.857)
  Bottom Layer w0.25: DD12.6@575.12,480 576.132,480 576.275,479.857 v1(593.598,479.857)
NetDD12_8: DD12.8 R175.1 | length 48.6
  Top Layer w0.25: R175.1@589,455 589,456.412 589.89,457.302 589.89,466.75 592.557,469.417 592.557,484.22 v1(592.613,484.276)
  Bottom Layer w0.25: DD12.8@575.12,485.08 591.81,485.08 v1(592.613,484.276)
NetDD13_17: DD13.17 R177.1 R178.2 | length 321
  Top Layer w0.25: R177.1@540,654 542.239,654 545.239,651 R178.2@547.497,651 ; R178.2@547.5,651 R178.2@547.497,651 ; v1(548.386,656.107) 548.386,655.483 548.625,655.244 548.625,653.175 548.132,653.175 547.497,652.54 R178.2@547.497,651 ; DD13.17@740,532.5 740.664,532.5 741.893,533.729 741.893,542.214 741.909,542.229 741.909,633.832 v1(742.417,634.34)
  Bottom Layer w0.25: v1(548.386,656.107) 549.173,655.32 637.464,655.32 639.003,653.781 702.097,653.781 719.988,635.889 740.867,635.889 v1(742.417,634.34)
NetDD13_37: DD13.37 X1.10 | length 54.6
  Top Layer w0.25: v1(759.739,525.424) 768.68,534.365 768.68,566.18 X1.10@772.5,570
  Bottom Layer w0.25: DD13.37@755.2,525 755.624,525.424 v1(759.739,525.424)
NetDD13_38: DD13.38 X1.11 | length 60.2
  Bottom Layer w0.25: DD13.38@755.2,527.5 757.098,529.398 757.098,539.877 755.904,541.071 754.888,541.071 753.817,542.142 753.817,548.883 754.304,549.37 754.304,555.752 754.863,556.311 762.864,556.311 771.5,564.947 771.5,571.5 X1.11@772.5,572.5
NetDD13_39: DD13.39 X1.12 | length 62.1
  Top Layer w0.25: X1.12@772.5,575 773.481,574.019 v1(773.481,542.722)
  Bottom Layer w0.25: DD13.39@755.2,530 754.304,529.104 754.304,526.948 754.634,526.618 756.226,526.618 772.33,542.722 v1(773.481,542.722)
NetDD13_40: DD13.40 X1.13 | length 68.4
  Top Layer w0.25: v1(759.739,527.787) 760.425,528.472 760.425,565.425 X1.13@772.5,577.5
  Bottom Layer w0.25: DD13.40@755.2,532.5 753.796,531.096 753.796,526.618 754.38,526.034 757.987,526.034 v1(759.739,527.787)
NetDD13_41: DD13.41 X1.14 | length 66
  Top Layer w0.25: DD13.41@755.2,535 757.657,537.457 757.657,583.184 758.368,583.895 768.605,583.895 X1.14@772.5,580
NetDD13_42: DD13.42 X1.15 | length 64
  Top Layer w0.25: DD13.42@755.2,537.5 757.123,539.423 757.123,584.2 757.631,584.708 770.292,584.708 X1.15@772.5,582.5
NetDD13_45: DD13.45 X1.16 | length 53.2
  Bottom Layer w0.25: DD13.45@755.2,545 764.199,553.999 773.176,553.999 773.481,554.304 773.481,584.019 X1.16@772.5,585
NetDD13_46: DD13.46 X1.17 | length 48.8
  Top Layer w0.25: v1(761.314,554.863) 761.314,565.556 772.008,576.25 772.668,576.25 773.983,577.565 773.983,586.017 X1.17@772.5,587.5
  Bottom Layer w0.25: DD13.46@755.2,547.5 761.314,553.614 v1(761.314,554.863)
NetDD13_47: DD13.47 X1.18 | length 76.5
  Top Layer w0.25: v1(772.414,543.662) 772.414,542.544 773.125,541.833 773.938,541.833 774.487,542.382 774.487,588.013 X1.18@772.5,590
  Bottom Layer w0.25: DD13.47@755.2,550 755.2,548.945 754.321,548.066 754.321,544.432 755.091,543.662 v1(772.414,543.662)
NetDD13_48: DD13.48 X1.19 | length 51.2
  Top Layer w0.25: v1(759.536,554.533) 759.536,566.42 771.855,578.739 772.998,578.739 773.479,579.22 773.479,583.184 773.184,583.479 772.49,583.479 771.5,584.47 771.5,591.5 X1.19@772.5,592.5
  Bottom Layer w0.25: DD13.48@755.2,552.5 757.233,554.533 v1(759.536,554.533)
NetDD14_17: DD14.17 R179.1 R180.2 | length 211.2
  Top Layer w0.25: R179.1@566.5,692.5 567.649,693.649 573.851,693.649 R180.2@575,692.5 575,693.572 584.86,693.572 586.613,691.82 586.613,663.372 v1(589.204,660.781)
  Bottom Layer w0.25: v1(589.204,660.781) 697.382,660.781 709.244,648.919 714.995,648.919 716.153,650.078 717.931,650.078 718.009,650 DD14.17@740,650
NetDD14_37: DD14.37 X1.20 | length 54.7
  Top Layer w0.25: DD14.37@755.2,642.5 757.199,640.501 757.199,610.301 X1.20@772.5,595
NetDD14_38: DD14.38 X1.21 | length 54.7
  Top Layer w0.25: DD14.38@755.2,645 757.987,642.213 757.987,612.013 X1.21@772.5,597.5
NetDD14_39: DD14.39 X1.22 | length 54.7
  Top Layer w0.25: DD14.39@755.2,647.5 769.645,633.055 769.645,602.855 X1.22@772.5,600
NetDD14_40: DD14.40 X1.23 | length 54.7
  Top Layer w0.25: DD14.40@755.2,650 770.407,634.793 770.407,604.593 X1.23@772.5,602.5
NetDD14_41: DD14.41 X1.24 | length 54.7
  Top Layer w0.25: DD14.41@755.2,652.5 770.966,636.734 770.966,606.534 X1.24@772.5,605
NetDD14_42: DD14.42 X1.25 | length 55.9
  Bottom Layer w0.25: DD14.42@755.2,655 773.983,636.217 773.983,608.983 X1.25@772.5,607.5
NetDD14_45: DD14.45 X1.26 | length 69.6
  Top Layer w0.25: v1(752.602,616.61) 752.602,659.902 DD14.45@755.2,662.5
  Bottom Layer w0.25: v1(752.602,616.61) 759.212,610 X1.26@772.5,610
NetDD14_46: DD14.46 X1.27 | length 70.7
  Top Layer w0.25: v1(749.579,624.459) 749.579,659.379 DD14.46@755.2,665
  Bottom Layer w0.25: v1(749.579,624.459) 761.538,612.5 X1.27@772.5,612.5
NetDD14_47: DD14.47 X1.28 | length 63.1
  Bottom Layer w0.25: DD14.47@755.2,667.5 756.082,666.618 756.082,656.844 755.574,656.336 754.812,656.336 754.304,655.828 754.304,653.974 754.888,653.39 756.082,653.39 772.541,636.93 772.541,621.817 773.479,620.879 773.479,615.979 X1.28@772.5,615
NetDD14_48: DD14.48 X1.29 | length 89.3
  Top Layer w0.25: DD14.48@755.2,670 753.796,671.404 753.796,682.498 754.685,683.387 757.631,683.387 771.521,669.497 771.521,618.479 X1.29@772.5,617.5
NetDD15_3: DD15.3 L24.2 | length 15.3
  Top Layer w0.25: L24.2@629.5,507.5 629.5,498.792 628.65,497.942 628.65,493.984 628.904,493.73 DD15.3@630,493.73
NetDD15_11: DD15.11 R196.1 R197.1 | length 85.8
  Top Layer w0.25: R197.1@625,442.5 R196.1@625,447.5 647.881,447.5 649.097,448.716 649.097,490.728 647.365,492.46 DD15.11@635.6,492.46
NetDD15_13: DD15.13 DD16.9 R188.1 | length 96.8
  Top Layer w0.25: v1(633.984,495) DD15.13@635.6,495 ; v1(689.712,493.7) 689.712,495 R188.1@690,495 691.053,495 692.277,493.776 692.277,475.59 697.306,470.56 704.85,470.56 705.2,470.91 DD16.9@705.2,472.15
  Bottom Layer w0.25: v1(633.984,495) 635.284,493.7 v1(689.712,493.7)
NetDD16_1: DD16.1 R192.1 | length 39.2
  Top Layer w0.25: R192.1@704,506 708.33,506 709.193,505.136 709.193,496.9 710.641,495.452 710.641,474.193 710.4,473.951 DD16.1@710.4,472.15
NetDD16_6: DD16.6 R202.1 | length 29
  Top Layer w0.25: v1(696.062,494.995) 696.066,495 R202.1@697.5,495 ; DD16.6@707.15,472.15 707.15,472.971 707.233,473.054 707.233,475.677 707.15,475.76 v1(707.15,484.059)
  Bottom Layer w0.25: v1(696.062,494.995) 696.214,494.995 v1(707.15,484.059)
NetDD16_15: DD16.15 R185.2 R198.2 | length 75.9
  Top Layer w0.25: R198.2@662.5,418 662.5,421.488 R185.2@662.5,425 664.903,425 666.979,427.076 666.979,451.932 672.033,456.987 675.726,456.987 676.046,456.667 686.054,456.667 694.387,465 DD16.15@700,465
NetDD16_16: DD16.16 R186.2 R200.2 | length 75.5
  Top Layer w0.25: R200.2@670,418 672.236,418 675.236,415 R186.2@677.5,415 681.751,415 683.311,416.56 683.311,420.065 686.054,422.808 686.054,439.598 697.357,450.901 697.357,451.841 704.19,458.673 704.19,463.804 703.644,464.35 DD16.16@700,464.35
NetDD16_23: DD16.23 R214.2 R231.1 | length 158.5
  Top Layer w0.25: v1(625,472.999) R231.1@625,475 ; R214.2@700,418 699.694,418 699.694,417.322 688.848,417.043 687.68,418.211 687.68,438.48 697.484,448.285 702.056,448.285 705.85,452.079 DD16.23@705.85,457.2 v1(705.85,462.701)
  Bottom Layer w0.25: v1(625,472.999) 625.798,473.797 671.421,473.797 672.219,472.999 690.575,472.999 693.061,470.513 702.372,470.513 702.914,469.972 702.914,465.637 v1(705.85,462.701)
NetDD16_24: DD16.24 R216.2 R232.1 | length 99.4
  Top Layer w0.25: v1(653.567,417.22) 653.567,417.576 653.991,418 R232.1@655,418 ; DD16.24@706.5,457.2 706.5,454.914 706.653,454.761 706.653,418.58 v1(706.073,418) R216.2@707.5,418
  Bottom Layer w0.25: v1(653.567,417.22) 658.038,412.75 700.823,412.75 v1(706.073,418)
NetDD16_40: DD16.40 R207.2 R208.1 | length 136.2
  Top Layer w0.25: v1(695.071,506.019) 695.071,506 R208.1@696.5,506 ; v1(712.001,467.589) 712.013,467.6 DD16.40@714.95,467.6 715.264,467.6 715.264,497.027 v1(715.518,497.281) ; v1(773.989,459.562) 774,459.573 R207.2@774,461
  Bottom Layer w0.25: v1(695.071,506.019) 705.18,506.019 713.918,497.281 v1(715.518,497.281) ; v1(712.001,467.589) 710.617,467.589 708.559,469.646 708.559,471.094 708.741,471.276 732.644,471.276 732.767,471.399 747.903,471.399 759.739,459.562 v1(773.989,459.562)
NetDD16_42: R189.1 R204.2 | length 60.5
  Top Layer w0.25: v1(723.57,427.99) 723.58,428 R204.2@725,428 ; R189.1@771,446 v1(771,448.945)
  Bottom Layer w0.25: v1(723.57,427.99) 734.517,427.99 755.472,448.945 v1(771,448.945)
NetDD16_43: R190.1
NetDD16_44: R191.1
NetDD17_5: DD17.5 R235.2 | length 100.6
  Top Layer w0.25: R235.2@735,460 735,462.915 736.676,464.591 v1(736.676,472.897)
  Bottom Layer w0.25: DD17.5@652.5,479.8 698.531,479.8 702.654,475.677 707.558,475.677 710.196,473.04 736.534,473.04 v1(736.676,472.897)
NetDD17_6: DD17.6 R234.2 | length 91.3
  Top Layer w0.25: v1(731.774,472.161) 732,471.935 R234.2@732,467.5
  Bottom Layer w0.25: DD17.6@652.5,482.34 651.612,481.452 651.612,479.273 653.288,477.596 699.639,477.596 702.062,475.173 706.374,475.173 709.387,472.161 v1(731.774,472.161)
NetL2_2: L2.2 R9.1 VD4.2 | length 288.4
  Top Layer w0.25: v1(389.484,533.527) 389.5,533.543 L2.2@389.5,537.5 ; v1(420.154,422.859) 421.513,421.5 VD4.2@422.351,421.5 ; v1(422.351,420.218) VD4.2@422.351,421.5 ; VD4.2@422.5,421.5 VD4.2@422.351,421.5 ; R9.1@483.5,480 483.5,478.257 484.149,477.607 v1(484.149,436.855)
  Bottom Layer w0.25: v1(389.484,533.527) 381.432,533.527 367.005,519.1 367.005,445.44 389.585,422.859 v1(420.154,422.859) ; v1(422.351,420.218) 441.706,420.218 443.357,421.869 470.332,421.869 477.85,429.387 482.752,429.387 484.149,430.784 v1(484.149,436.855)
NetL3_2: L3.2 R10.1 VD7.2 | length 216.7
  Top Layer w0.25: v1(386.969,446.329) 386.969,510.803 391.075,514.909 391.075,520.075 389.5,521.65 L3.2@389.5,527.5 ; v1(411.073,446) R10.1@411.759,446 ; v1(411.759,443.56) R10.1@411.759,446 ; R10.1@412.5,446 R10.1@411.759,446 ; VD7.2@495,431 494.843,431 494.843,432.562 v1(495.148,432.867)
  Bottom Layer w0.25: v1(386.969,446.329) 410.744,446.329 v1(411.073,446) ; v1(411.759,443.56) 466.75,443.56 470.586,447.396 497.357,447.396 497.713,447.04 497.713,443.509 495.148,440.944 v1(495.148,432.867)
NetL4_2: L4.2 R15.2 R19.1 | length 152.9
  Top Layer w0.25: v1(379.755,450.52) 379.755,507.272 389.5,517.017 L4.2@389.5,517.5 ; v1(436.073,449) R15.2@437.5,449 ; v1(455.701,447.929) 456.63,447 R19.1@457.5,447
  Bottom Layer w0.25: v1(379.755,450.52) 381.889,448.386 395.58,448.386 397.104,449.91 435.163,449.91 v1(436.073,449) 454.63,449 v1(455.701,447.929)
NetL5_2: L5.2 R16.2 R20.1 | length 146.1
  Top Layer w0.25: L5.2@390,505 390,502.183 393.903,498.28 393.903,450.748 v1(394.259,450.393) ; v1(441.073,446) R16.2@442.5,446 ; v1(461.061,446) R20.1@462.5,446
  Bottom Layer w0.25: v1(394.259,450.393) 394.335,450.469 455.346,450.469 456.971,448.843 456.971,447.548 455.423,446 ; v1(441.073,446) 455.423,446 ; v1(461.061,446) 455.423,446
NetL6_2: L6.2 R17.2 R21.1 | length 122.1
  Top Layer w0.25: L6.2@389.5,495 389.5,492.125 v1(389.509,492.116) ; R17.2@447.5,446 449.124,446 ; v1(451.206,455.778) 451.206,448.081 449.124,446 ; R21.1@467.5,446 465.455,446 464.514,445.059 455.447,445.059 454.506,446 449.124,446
  Bottom Layer w0.25: v1(389.509,492.116) 389.509,481.101 395.351,475.259 395.351,467.36 406.603,456.108 450.875,456.108 v1(451.206,455.778)
NetR209_2: R209.2 VT1.3 | length 16.6
  Top Layer w0.25: v1(703.58,428.981) 703.58,428.508 704.088,428 R209.2@705,428 ; v1(710.692,428.981) 715.173,424.5 VT1.3@716.25,424.5
  Bottom Layer w0.25: v1(703.58,428.981) v1(710.692,428.981)
NetR218_2: R218.2 R226.1 VT1.2 | length 85.9
  Top Layer w0.25: v1(665.48,447.396) 665,447.876 R218.2@665,450 665,453.455 667.5,455.956 R226.1@667.5,457.5 ; v1(713.257,428.75) VT1.2@715,428.75
  Bottom Layer w0.25: v1(665.48,447.396) 692.861,447.396 696.138,450.672 702.128,450.672 702.31,449.686 700.899,448.275 697.484,448.275 697.088,447.878 697.088,444.109 699.719,441.477 703.123,441.477 713.257,431.343 v1(713.257,428.75)
NetR231_2: R231.2 VT2.1 | length 9.5
  Top Layer w0.25: R231.2@622,475 v1(622,477.5)
  Bottom Layer w0.25: VT2.1@615,477.5 v1(622,477.5)
NetR232_2: R232.2 VT4.1 | length 37.6
  Top Layer w0.25: v1(640.461,437.039) 640.461,426.481 651.942,415 R232.2@655,415
  Bottom Layer w0.25: VT4.1@635,442.5 v1(640.461,437.039)